# Altium PCB PCB1.PcbDoc (part 5 of 6)
Units mil, origin at the board's own origin, x right, y up, seen from the top; angles counter-clockwise.
Board outline 7480.32 x 4921.26 mil, 4 copper layers (Top Layer, GND, POWER, Bottom Layer), stack 23.756 mil thick; 513 components, 387 nets, 1792 pads, 594 vias.
Unrouted connection lines stored in the file: 21.
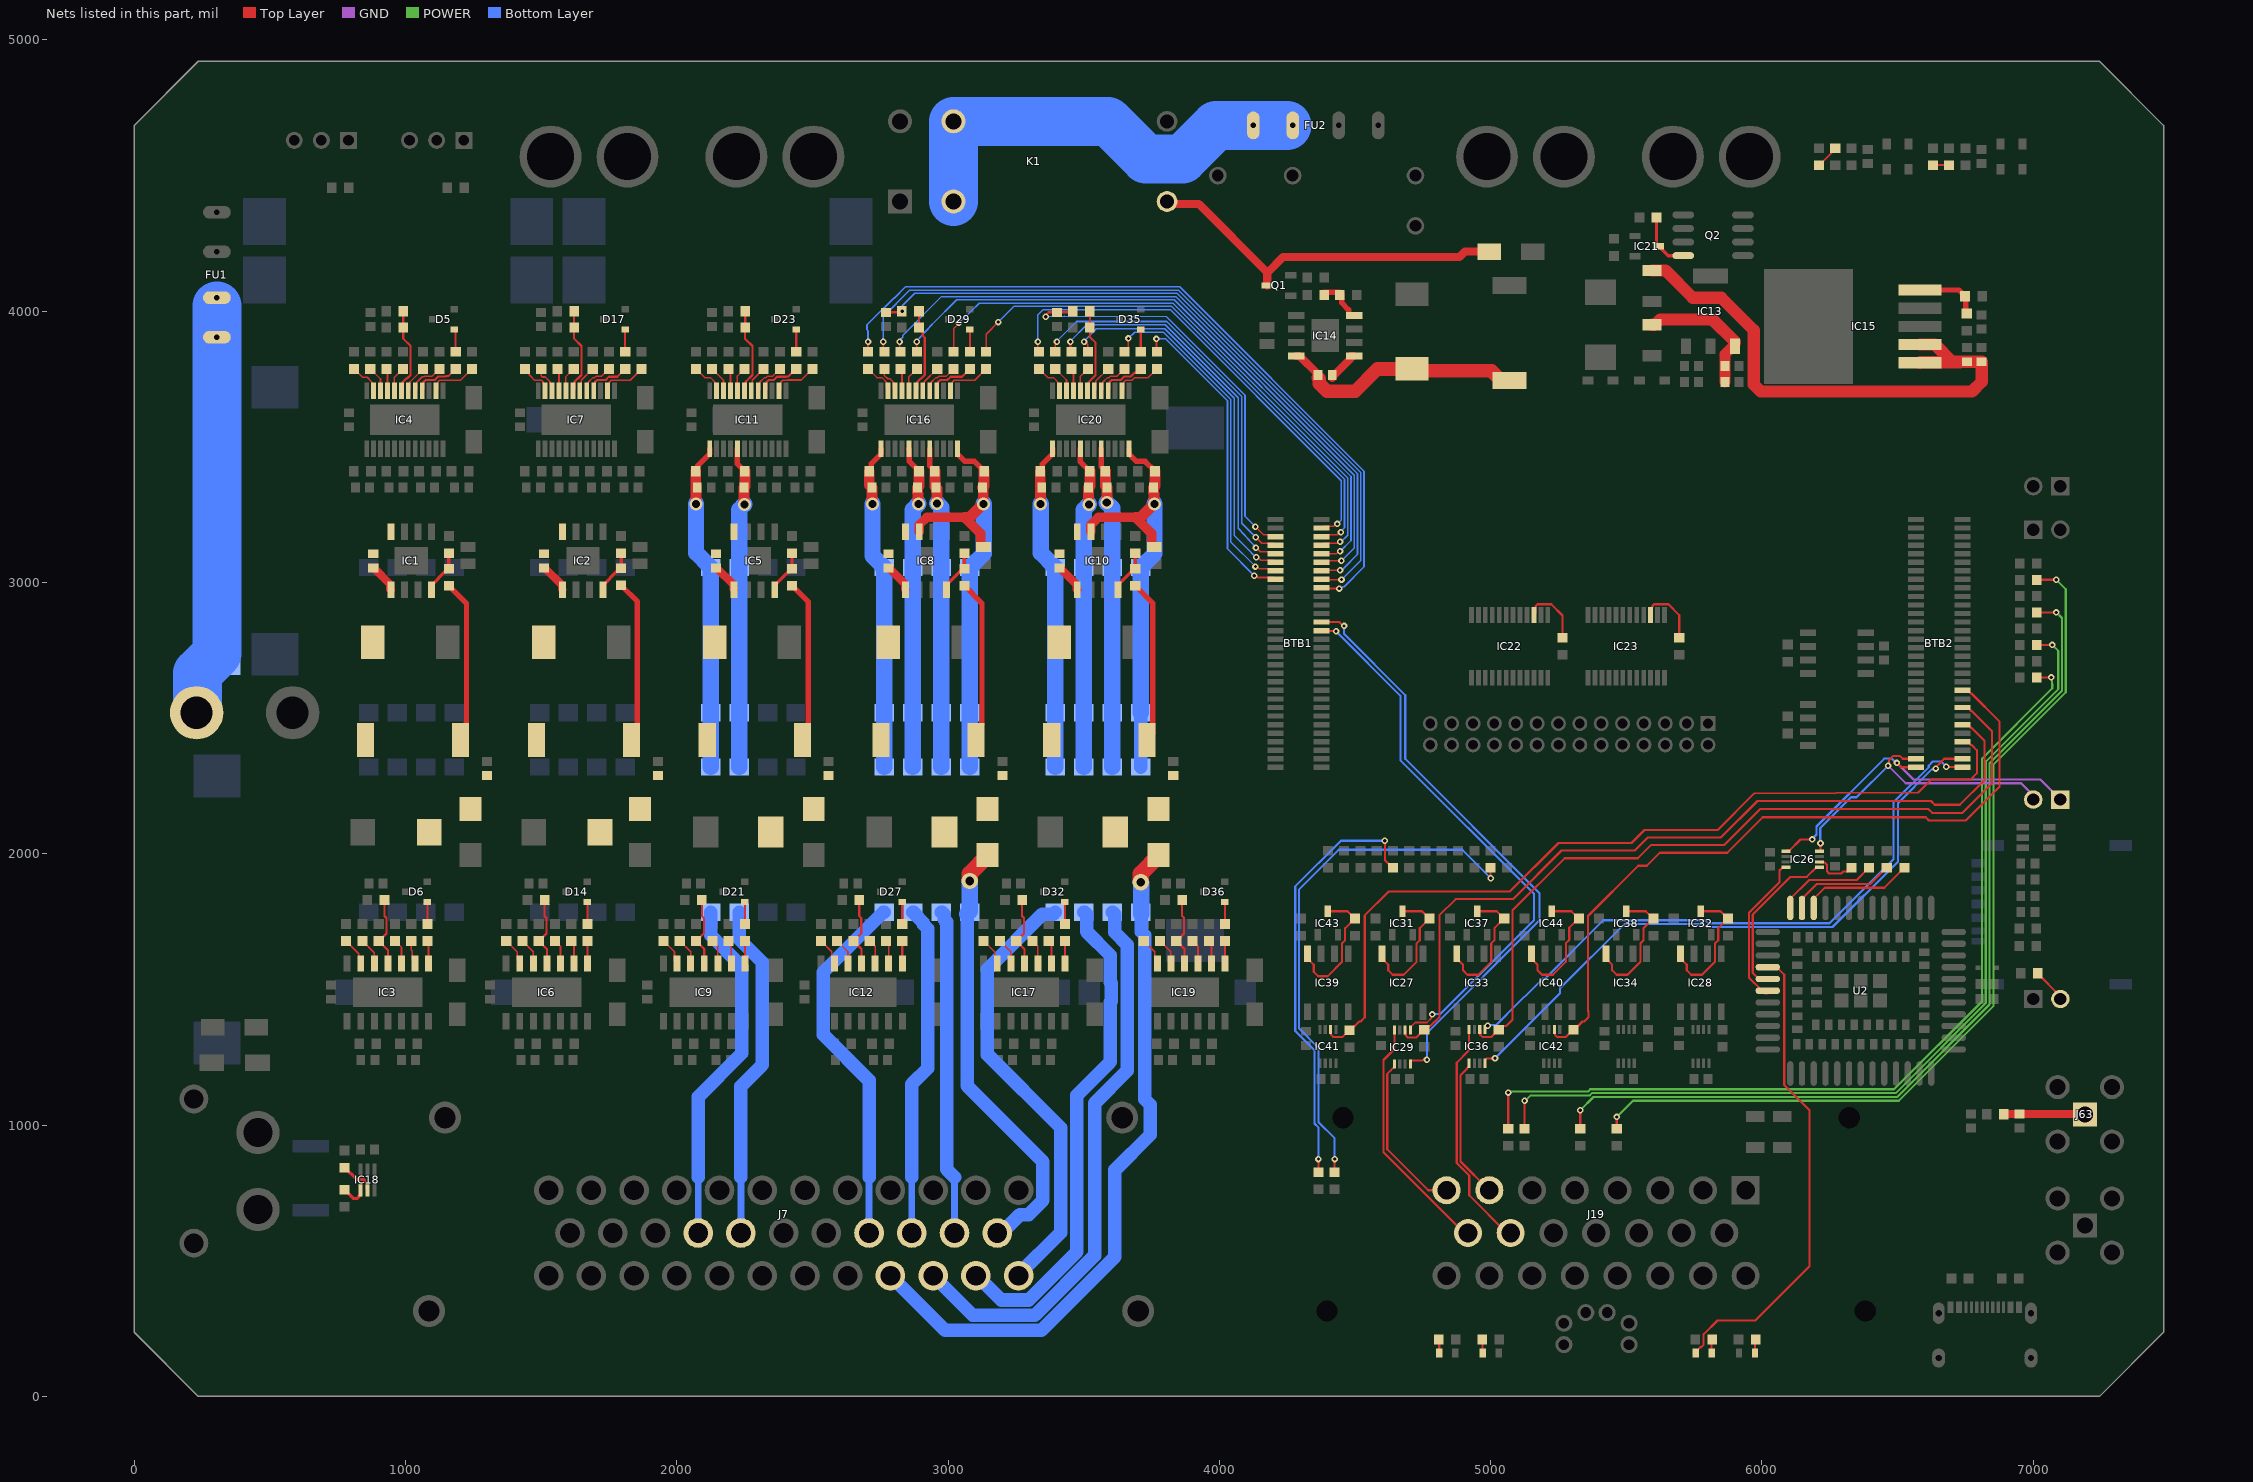
[diagram p6: the nets of this part, all layers, seen from the top]

## Via types
v1: diameter 24, hole 12, Top Layer to Bottom Layer, 532 vias
v2: diameter 48, hole 30, Top Layer to Bottom Layer, 20 vias
v3: diameter 48, hole 24, Top Layer to Bottom Layer, 16 vias
v4: diameter 48, hole 32, Top Layer to Bottom Layer, 10 vias
v5: diameter 60, hole 32, Top Layer to Bottom Layer, 7 vias
v6: diameter 251.97, hole 165.35, Top Layer to Bottom Layer, 4 vias
v7: diameter 31.5, hole 31.5, Top Layer to Bottom Layer, 2 vias
v8: diameter 47.24, hole 47.24, Top Layer to Bottom Layer, 2 vias
v9: diameter 36, hole 24, Top Layer to Bottom Layer, 1 vias

## Nets (pads, with @x,y where several pads share a name; then routed paths per layer and width w, separated by ;. In a path a pad name is that pad's centre, name@x,y a point inside that pad or via, vN(x,y) a via of type N, cw(c..) or ccw(c..) an arc to the next point about the centre after c; other vN are vias at no path point) (continued)
lpHSD3_OUT2: C50.2 IC11.17 J7.19 J42.1 J42.2 J45.1 J45.2 R77.2 | length 2432.7
  Top Layer w20: IC11.17@2223.6,3493.23 2223.6,3437.66 R77.2@2242.56,3418.7
  Top Layer w40: v2(2249.34,3288.08) 2247.81,3289.61 2247.81,3330.73 2247.24,3331.3 C50.2@2247.24,3350 2251.26,3354.02 R77.2@2251.26,3410
  Bottom Layer w25: J7.19@2236.38,602.52 2236.38,808.01
  Bottom Layer w50: J42.2@2230,1784.57 2230,1685 2315,1600 2315,1221.91 2236.38,1143.28 2236.38,808.01
  Bottom Layer w60: J42.1@2230,2320 J45.2@2230,2520 J45.1@2230,3055.43 2230,3268.74 v2(2249.34,3288.08)
lpHSD3_OUT3: C51.2 IC11.13 J7.20 J44.1 J44.2 J46.1 J46.2 R82.2 | length 2492.4
  Top Layer w20: 2077.48,3430.59 2121.24,3474.35 IC11.13@2121.24,3493.23
  Top Layer w40: R82.2@2069.76,3410 2069.76,3355.51 2071.26,3354.02 v2(2071.26,3290)
  Bottom Layer w25: J7.20@2078.9,602.52 2078.9,808.01
  Bottom Layer w50: 2078.9,808.01 2078.9,1103.9 2240,1265 2240,1585 2125,1700 J46.1@2125,1784.57
  Bottom Layer w60: v2(2071.26,3290) 2071.26,3109.17 2119.57,3060.87 2119.57,3056.93 2121.06,3055.43 J44.2@2125,3055.43 J44.1@2125,2520 J46.2@2125,2320
lpHSD4_DSEL0_PTD27: BTB1.26 R98.1 | length 2339.6
  Top Layer w6: v1(2885,3888) 2885,3850.28 R98.1@2885.28,3850 ; BTB1.26@4376.38,3106.3 4431.43,3106.3 4440.13,3115 v1(4445,3115)
  Bottom Layer w6: v1(2885,3888) 2885,3890.5 2941.61,3951.94 cw(c2960,3935) 2942.36,3952.71 3032,4042 3833.91,4042 4485.26,3390.65 4485.26,3154.9 4445.36,3115 v1(4445,3115)
lpHSD4_DSEL1_PTD29: BTB1.22 R109.1 | length 2817.9
  Top Layer w6: v1(2705,3888) 2705,3850.28 R109.1@2705.28,3850 ; BTB1.22@4376.38,2980.31 4380.23,2976.46 4381.66,2977.89 v1(4442.33,2977.89)
  Bottom Layer w6: v1(2705,3888) 2705,3928.07 2701.26,3931.81 2701.26,3950 2799.65,4048.39 2801.64,4048.39 2843.25,4090 3853.79,4090 4533.26,3410.53 4533.26,3057.9 4460.36,2985 4454.31,2985 4447.2,2977.89 v1(4442.33,2977.89)
lpHSD4_IN0_PTB9: BTB1.28 R90.1 | length 1972.3
  Top Layer w6: R90.1@3140.28,3850 3140.28,3915.28 v1(3185,3960) ; BTB1.28@4376.38,3169.29 4383.22,3176.13 4434.52,3176.13 4443.39,3185 v1(4448.26,3185)
  Bottom Layer w6: v1(3185,3960) 3243,4018 3823.97,4018 4461.26,3380.71 4461.26,3201.7 4448.26,3188.7 v1(4448.26,3185)
lpHSD4_IN1_PTD26: BTB1.27 R93.1 | length 2168.2
  Top Layer w6: R93.1@3020.28,3850 3021.26,3850.98 3021.26,3936.26 3040,3955 v1(3040,3957) ; BTB1.27@4376.38,3137.8 4383.22,3144.64 4434.77,3144.64 4440.13,3150 v1(4445,3150)
  Bottom Layer w6: v1(3040,3957) 3056.62,3972.97 ccw(c3039.3,3990.99) 3056.76,3973.11 3115,4030 3828.94,4030 4473.26,3385.68 4473.26,3174.64 4448.62,3150 v1(4445,3150)
lpHSD4_IN2_PTB8: BTB1.25 R101.1 | length 2474.7
  Top Layer w6: v1(2821.26,3888) 2821.26,3854.02 R101.1@2825.28,3850 ; BTB1.25@4376.38,3074.8 4381.57,3080 v1(4450,3080)
  Bottom Layer w6: v1(2821.26,3888) 2821.26,3892.87 2832.58,3904.19 2832.58,3910.62 2975.96,4054 3838.88,4054 4497.26,3395.62 4497.26,3127.26 v1(4450,3080)
lpHSD4_IN3_PTA1: BTB1.23 R104.1 | length 2709.4
  Top Layer w6: v1(2761.26,3888) 2761.26,3854.02 R104.1@2765.28,3850 ; BTB1.23@4376.38,3011.81 4377.23,3010.96 v1(4450.23,3010.96)
  Bottom Layer w6: v1(2761.26,3888) 2761.26,3980 2859.26,4078 3848.82,4078 4521.26,3405.56 4521.26,3081.26 4450.96,3010.96 v1(4450.23,3010.96)
lpHSD4_IS_PTD28: BTB1.24 C62.2 R96.1 | length 2509
  Top Layer w6: BTB1.24@4376.38,3043.31 4378.07,3045 v1(4445,3045)
  Top Layer w8: C62.2@2771.26,3995.98 2827.24,3995.98 v1(2831.26,4000)
  Bottom Layer w6: v1(2831.26,4000) 2831.26,4020 2877.26,4066 3843.85,4066 4509.26,3400.59 4509.26,3103.9 4460.36,3055 4459.87,3055 4449.87,3045 v1(4445,3045)
lpHSD4_OUT0: C36.2 C56.2 D19.1 IC8.7 IC16.24 J7.13 J30.1 J30.2 J35.1 J35.2 R91.2 | length 3335.6
  Top Layer w20: IC16.24@3034.87,3493.23 3034.87,3474.35 3062.24,3446.99 3096.76,3446.99 3132.76,3410.98 R91.2@3132.76,3410
  Top Layer w35: IC8.7@2893.76,3186.77 2893.76,3212.82 2921.23,3240.29 3060.86,3240.29 3120.14,3181.01 3120.14,3132.5 3121.54,3131.1 C36.2@3130,3131.1
  Top Layer w40: 3060.86,3240.29 3079.39,3240.29 3129.1,3290 v2(3131.26,3290) ; v2@3129.73,3291.53 3129.73,3347.51 C56.2@3127.24,3350 3132.76,3355.51 R91.2@3132.76,3410
  Top Layer w60: v5(3080,1900) 3080,1926.77 3145,1991.77 D19.1@3145,1995.71
  Bottom Layer w50: J30.1@3070,1778.07 3070,1145 3349.63,865.37 3349.63,722.88 3297.12,670.37 3265.15,670.37 3197.29,602.52 J7.13@3181.26,602.52
  Bottom Layer w60: J30.1@3070,1778.07 3080,1788.07 v5(3080,1900) ; J30.2@3080,2320 J35.2@3080,2520 J35.1@3080,3055.43 3083.94,3055.43 3085.43,3056.93 3085.43,3060.87 3131.26,3106.69 v2(3131.26,3290)
lpHSD4_OUT1: C61.2 IC16.20 J7.14 J49.1 J49.2 J51.1 J51.2 R97.2 | length 2395.4
  Top Layer w20: IC16.20@2932.51,3493.23 2932.51,3429.73 2951.26,3410.98 R97.2@2951.26,3410
  Top Layer w40: R97.2@2951.26,3410 2951.26,3354.02 C61.2@2955.28,3350 2959.73,3345.55 v2(2959.73,3291.79)
  Bottom Layer w25: J7.14@3023.78,602.52 3023.78,808.01
  Bottom Layer w50: J51.1@2975,1784.57 2978.94,1784.57 2985.43,1778.07 2985.43,1758.35 2995,1748.78 2995,836.79 3023.78,808.01
  Bottom Layer w60: v2(2959.73,3291.79) 2975,3276.52 J49.2@2975,3055.43 J49.1@2975,2520 J51.2@2975,2320
lpHSD4_OUT2: C63.2 IC16.17 J7.15 J50.1 J50.2 J53.1 J53.2 R105.2 | length 2432.8
  Top Layer w20: IC16.17@2855.74,3493.23 2856.47,3492.5 2856.47,3447.27 2892.76,3410.98 R105.2@2892.76,3410
  Top Layer w40: v2(2891.26,3290) 2889.73,3291.53 2889.73,3328.81 2887.24,3331.3 C63.2@2887.24,3350 2892.76,3355.51 R105.2@2892.76,3410
  Bottom Layer w25: J7.15@2866.3,602.52 2866.3,808.01
  Bottom Layer w50: 2866.3,808.01 2866.3,1151.38 2925,1210.08 2925,1723.8 2908.57,1740.23 2908.57,1746 2880.43,1774.13 2880.43,1778.07 2873.94,1784.57 J50.2@2870,1784.57
  Bottom Layer w60: J50.1@2870,2320 J53.2@2870,2520 J53.1@2870,3055.43 2870,3268.74 v2(2891.26,3290)
lpHSD4_OUT3: C73.2 IC16.13 J7.16 J52.1 J52.2 J54.1 J54.2 R115.2 | length 2564
  Top Layer w20: R115.2@2709.76,3410 2717.48,3417.72 2717.48,3438.45 2753.38,3474.35 IC16.13@2753.38,3493.23
  Top Layer w40: R115.2@2709.76,3410 2709.76,3359.53 2719.73,3349.56 2719.73,3291.53 v2(2721.26,3290)
  Bottom Layer w25: J7.16@2708.82,602.52 2708.82,808.01
  Bottom Layer w50: 2708.82,808.01 2708.82,1164.94 2540,1333.76 2540,1563.5 2761.06,1784.57 J52.2@2765,1784.57
  Bottom Layer w60: v2(2721.26,3290) 2721.26,3099.17 2759.57,3060.87 2759.57,3056.93 2761.06,3055.43 J54.1@2765,3055.43 J54.2@2765,2520 J52.1@2765,2320
lpHSD5_DSEL0_PTA3: BTB1.36 R134.1 | length 1422.8
  Top Layer w6: v1(3501.26,3888) 3503.26,3888 3515.28,3875.98 R134.1@3515.28,3850 ; v1(4136,3093) 4140.87,3093 4152.23,3081.65 4199.46,3081.65 BTB1.36@4206.3,3074.8
  Bottom Layer w6: v1(3501.26,3888) 3501.26,3889.72 3546.53,3934.99 3798.95,3934.99 4055,3678.94 4055,3173.31 4117.22,3110.42 ccw(c4135,3128) 4118.01,3109.66 v1(4136,3093)
lpHSD5_DSEL1_PTB10: BTB1.29 R145.1 | length 1755
  Top Layer w6: v1(3331.26,3888) 3331.26,3854.02 R145.1@3335.28,3850 ; BTB1.29@4376.38,3200.79 4383.22,3207.63 4421.16,3207.63 4429.62,3216.09 v1(4434.49,3216.09)
  Bottom Layer w6: v1(3331.26,3888) 3331.26,3986.62 3349.64,4005 3820,4005 4449.26,3375.74 4449.26,3230.44 4434.91,3216.09 v1(4434.49,3216.09)
lpHSD5_IN0_PTD24: BTB1.38 R121.1 | length 1173.8
  Top Layer w6: v1(3768.26,3897.99) 3768.26,3852.02 R121.1@3770.28,3850 ; v1(4129,3025) 4133.87,3025 4140.22,3018.65 4199.46,3018.65 BTB1.38@4206.3,3011.81
  Bottom Layer w6: v1(3768.26,3897.99) 3802.01,3897.99 4030,3670 4030,3124 v1(4129,3025)
lpHSD5_IN1_PTA2: BTB1.37 R126.1 | length 1279.1
  Top Layer w6: R126.1@3650.28,3850 3664.68,3864.4 v1(3664.68,3899.93) ; v1(4133,3058.76) 4137.87,3058.76 4146.48,3050.15 4199.46,3050.15 BTB1.37@4206.3,3043.31
  Bottom Layer w6: v1(3664.68,3899.93) 3687.74,3922.99 3793.98,3922.99 4042,3674.97 4042,3149.76 v1(4133,3058.76)
lpHSD5_IN2_PTD23: BTB1.35 R139.1 | length 1455
  Top Layer w6: v1(3451.26,3888) 3451.26,3854.02 R139.1@3455.28,3850 ; v1(4135,3128) 4136.36,3128 4151.21,3113.14 4199.46,3113.14 BTB1.35@4206.3,3106.3
  Bottom Layer w6: v1(3451.26,3888) 3451.26,3890 3511.26,3950 3800.91,3950 4070,3680.91 4070,3202.09 4070,3199.78 4071.55,3198.07 v1(4135,3128)
lpHSD5_IN3_PTD2: BTB1.34 R142.1 | length 1492.2
  Top Layer w6: R142.1@3395.28,3850 3395.28,3879.14 3401.26,3885.13 v1(3401.26,3888) ; v1(4134,3167) 4156.36,3144.64 4199.46,3144.64 BTB1.34@4206.3,3137.8
  Bottom Layer w6: v1(3401.26,3888) 3401.26,3890 3473.26,3962 3787.14,3962 3805.88,3962 4082,3685.88 4082,3219 v1(4134,3167)
lpHSD5_IS_PTD3: BTB1.33 C81.2 R131.1 | length 1554.4
  Top Layer w6: v1(4133,3206) 4162.87,3176.13 4179.77,3176.13 4186.61,3169.29 BTB1.33@4206.3,3169.29
  Top Layer w8: v1(3360,3980) 3363.06,3983.06 3363.06,3988.29 3370.76,3995.98 3455.75,3995.98 R131.1@3459.76,4000
  Bottom Layer w6: v1(3360,3980) 3429.28,3981.99 cw(c3430,3957) 3430.18,3982 3804.85,3980 4094.5,3690.35 4094.5,3244.5 v1(4133,3206)
lpHSD5_OUT0: C46.2 C78.2 D24.1 IC10.7 IC20.24 J7.27 J38.1 J38.2 J40.1 J40.2 R123.2 | length 4292.5
  Top Layer w20: IC20.24@3667.01,3493.23 3667.01,3474.35 3694.37,3446.99 3726.76,3446.99 3762.76,3410.98 R123.2@3762.76,3410
  Top Layer w35: IC10.7@3526.26,3186.77 3526.26,3212.82 3553.73,3240.29 3690.86,3240.29 3750.14,3181.01 3750.14,3132.5 3751.54,3131.1 C46.2@3760,3131.1
  Top Layer w40: 3690.86,3240.29 3709.39,3240.29 3759.1,3290 v2(3761.26,3290) ; v2@3759.73,3291.53 3759.73,3328.81 3757.24,3331.3 C78.2@3757.24,3350 3762.76,3355.51 R123.2@3762.76,3410
  Top Layer w60: v5(3710,1895) 3710,1926.77 3775,1991.77 D24.1@3775,1995.71
  Bottom Layer w50: J7.27@2787.56,445.04 2989.19,243.41 3343.52,243.41 3615,514.9 3615,835 3745,965 3745,1075 3725,1095 3725,1700 3711.71,1713.29 J40.1@3711.71,1778.07 ; J40.2@3710,2320 J38.1@3710,2520
  Bottom Layer w60: v5(3710,1895) 3711.71,1893.29 J40.1@3711.71,1778.07 ; J38.1@3710,2520 J38.2@3710,3055.43 3713.94,3055.43 3715.43,3056.93 3715.43,3060.87 3761.26,3106.69 v2(3761.26,3290)
lpHSD5_OUT1: C80.2 IC20.20 J7.26 J57.1 J57.2 J59.1 J59.2 R132.2 | length 3253.5
  Top Layer w20: R132.2@3564.65,3426.1 IC20.20@3564.65,3493.23
  Top Layer w40: R132.2@3579.76,3410 3579.76,3355.51 C80.2@3585.28,3350 3585.28,3294.62 v2(3585.1,3294.45)
  Bottom Layer w50: J7.26@2945.04,445.04 3090.67,299.41 3320.32,299.41 3540,519.09 3540,1080 3660,1200 3660,1665 3614.21,1710.79 3614.21,1778.07 3607.72,1784.57 J57.2@3605,1784.57
  Bottom Layer w60: v2(3585.1,3294.45) 3605,3274.56 J59.1@3605,3055.43 J59.2@3605,2520 J57.1@3605,2320
lpHSD5_OUT2: C83.2 IC20.17 J7.25 J58.1 J58.2 J61.1 J61.2 R143.2 | length 3017.5
  Top Layer w20: IC20.17@3487.87,3493.23 3487.87,3444.88 R143.2@3514.06,3418.7
  Top Layer w40: v2(3519.41,3288.15) 3517.88,3289.68 3517.88,3330.67 3517.24,3331.3 C83.2@3517.24,3350 3522.76,3355.51 R143.2@3522.76,3410
  Bottom Layer w50: J7.25@3102.52,445.04 3106.59,445.04 3196.21,355.41 3297.12,355.41 3475,533.29 3475,1110 3598,1233 3598,1453.45 3601,1456.45 3601,1523.55 3598,1526.55 3598,1626.2 3510.43,1713.76 3510.43,1778.07 3503.94,1784.57 J61.1@3500,1784.57
  Bottom Layer w60: J61.2@3500,2320 J58.1@3500,2520 J58.2@3500,3055.43 3500,3268.74 v2(3519.41,3288.15)
lpHSD5_OUT3: C85.2 IC20.13 J7.24 J60.1 J60.2 J62.1 J62.2 R149.2 | length 2860.2
  Top Layer w20: R149.2@3339.76,3410 3347.48,3417.72 3347.48,3436.32 3385.51,3474.35 IC20.13@3385.51,3493.23
  Top Layer w40: R149.2@3339.76,3410 3339.76,3355.51 3341.26,3354.02 v2(3341.26,3290)
  Bottom Layer w50: J7.24@3260,445.04 3260,449.11 3415,604.11 3415,990 3145,1260 3145,1575 3348.07,1778.07 3388.5,1778.07 J62.1@3395,1784.57
  Bottom Layer w60: v2(3341.26,3290) 3341.26,3109.17 3389.57,3060.87 3389.57,3056.93 3391.06,3055.43 J60.2@3395,3055.43 J60.1@3395,2520 J62.2@3395,2320
LPUART0_RX_PTC3: BTB2.60 IC26.1 J64.1 | length 1312.4
  Top Layer w8: IC26.1@6087.99,2009.53 6089.9,2011.43 6100.72,2011.43 6142.29,2053 v1(6185,2053) ; v1(6497.5,2335) 6497.84,2335 6513.39,2319.45 6567.95,2319.45 BTB2.60@6568.5,2318.9
  GND w8: v1(6497.5,2335) 6558.4,2274.09 7025.91,2274.09 J64.1@7100,2200
  Bottom Layer w8: v1(6185,2053) 6185,2054.94 6201,2070.94 6201,2101 6451,2351 6479.56,2351 6495.56,2335 v1(6497.5,2335)
LPUART0_TX_PTC2: BTB2.59 IC26.8 J64.2 | length 1162
  Top Layer w8: IC26.8@6212.01,2009.53 6213.9,2009.53 6215.81,2011.43 v1(6215.81,2038.62) ; v1(6465,2325) 6468.06,2328.06 6468.06,2344.83 6484.23,2361 6508.3,2361 6518.91,2350.39 BTB2.59@6568.5,2350.39
  GND w8: v1(6465,2325) 6529.91,2260.09 6955,2260.09 7000,2215.09 J64.2@7000,2200
  Bottom Layer w8: v1(6215.81,2038.62) 6215,2039.43 6215,2095 6328.47,2208.47 6348.47,2208.47 v1(6465,2325)
LPUART1_RX_PTC6: BTB1.17 IC29.5 | length 2057.9
  Top Layer w6: IC29.5@4704.37,1350 4704.37,1360.83 4721.76,1378.21 4765.53,1378.21 4781.56,1394.24 4781.56,1404.56 v1(4785,1408)
  Top Layer w8: BTB1.17@4376.38,2822.83 4377.8,2821.42 4428.58,2821.42 v1(4430,2820)
  Bottom Layer w8: v1(4430,2820) 4667.34,2582.66 4667.34,2345.32 5160,1852.66 5160,1755 4815,1410 4787,1410 v1(4785,1408)
LPUART1_RX_PTC6_H: IC29.8 J19.15 | length 901.4
  Top Layer w8: IC29.8@4645.31,1350 4645.31,1280.31 4605,1240 4605,899.76 4902.24,602.52 J19.15@4916.38,602.52
LPUART1_TX_PTC7: BTB1.18 IC29.4 | length 2236
  Top Layer w8: BTB1.18@4376.38,2854.33 4441.34,2854.33 4455.49,2840.18 v1(4459.82,2840.18) ; IC29.4@4704.37,1225.98 4704.37,1236.81 4706.28,1238.72 4749.39,1238.72 4755.67,1245 4756.56,1245 4760.99,1240.57 v1(4765.32,1240.57)
  Bottom Layer w8: v1(4459.82,2840.18) 4459.82,2810.18 4685,2585 4685,2350 5180,1855 5180,1755 4765.83,1340.83 4765.83,1241.09 v1(4765.32,1240.57)
LPUART1_TX_PTC7_H: IC29.1 J19.8 | length 607.1
  Top Layer w8: IC29.1@4645.31,1225.98 4645.31,1215.16 4632.1,1201.94 4631.97,1201.94 4619,1188.97 4619,911 4770,760 J19.8@4837.64,760
LPUART14_RX_PTB21: BTB2.2 IC36.4 | length 2378.8
  Top Layer w8: IC36.4@4979.53,1227.99 4979.53,1238.82 4985.71,1245 5014.34,1245 v1(5016,1246.66) ; v1(6640.71,2314.32) 6640.71,2318.65 6657.81,2335.76 6657.81,2336.81 6671.39,2350.39 BTB2.2@6738.58,2350.39
  Bottom Layer w8: v1(5016,1246.66) 5255.92,1486.57 5255.92,1504.15 5492.77,1741 5785.77,1741 5796.77,1730 6260,1730 6501.32,1971.32 6501.32,2186.32 6626.26,2311.26 6637.65,2311.26 v1(6640.71,2314.32)
LPUART14_RX_PTB21_H: IC36.1 J19.7 | length 525
  Top Layer w8: IC36.1@4920.47,1227.99 4920.47,1217.17 4912.5,1209.2 4912.5,1207.47 4889,1183.97 4889,866.12 J19.7@4995.12,760
LPUART14_TX_PTB20: BTB2.1 IC36.5 | length 2319
  Top Layer w6: IC36.5@4979.53,1352.01 4979.53,1362.83 4982.95,1366.26 v1(4989.3,1366.26)
  Top Layer w8: v1(6679.45,2321.22) 6680.61,2320.06 6737.42,2320.06 BTB2.1@6738.58,2318.9
  Bottom Layer w8: v1(4989.3,1366.26) 4991.84,1368.8 5020.6,1368.8 5059.8,1408 5059.8,1408.12 5191.67,1540 5200,1540 5415,1755 5791.57,1755 5802.57,1744 6249,1744 6485,1980 6485,2190 6614.71,2319.71 6614.71,2325.09 6629.94,2340.32 6660.34,2340.32 v1(6679.45,2321.22)
LPUART14_TX_PTB20_H: IC36.8 J19.14 | length 859
  Top Layer w8: IC36.8@4920.47,1352.01 4920.47,1275.47 4875,1230 4875,860.32 4921,814.32 4921,741.24 5059.72,602.52 J19.14@5073.86,602.52
MAIN_RXD: IC26.5 U2.17 | length 597.9
  Top Layer w8: U2.17@6021.61,1538.74 5988.15,1538.74 5966.33,1560.55 5966.33,1776.33 6105,1915 6165.71,1915 6201.18,1950.47 IC26.5@6212.01,1950.47
MAIN_TXD: IC26.4 U2.18 | length 563.8
  Top Layer w8: U2.18@6022.48,1485 6011.04,1485 6000.61,1495.43 5952.33,1543.71 5952.33,1782.33 6065,1895 6065,1938.31 6077.17,1950.47 IC26.4@6087.99,1950.47
NET_STATUS: LED3.1 U2.16 | length 1762
  Top Layer w8: LED3.1@5755.47,160 5755.47,163.93 5772.83,181.3 5775.36,181.3 5785,190.94 5785,229.06 5835.94,280 5975.2,280 6175,479.8 6175,1055.29 6082.48,1147.81 6082.48,1554.64 6055.07,1582.04 U2.16@6021.61,1582.04
NetC2_1: C2.1 IC1.1 | length 109
  Top Layer w30: C2.1@881.26,3054.02 883.43,3054.02 944.06,2993.39 944.06,2975.43 IC1.1@946.26,2973.23
NetC2_2: C2.2 D3.1 IC1.8 L1.1
NetC3_1: C3.1 C6.2 D2.2 L1.2 R1.1 | length 605.2
  Top Layer w20: R1.1@1160,2988.5 1160.98,2988.5 1168.7,2980.79 1168.7,2979.8 1225,2923.5 1225,2484.71 1224.24,2483.94 1224.24,2441.5 L1.2@1202.74,2420
NetC14_1: C14.1 IC2.1 | length 110
  Top Layer w30: C14.1@1511.26,3054.02 1513.43,3054.02 1576.56,2990.89 1576.56,2975.43 IC2.1@1578.76,2973.23
NetC14_2: C14.2 D10.1 IC2.8 L3.1
NetC15_1: C15.1 C18.2 D9.2 L3.2 R26.1 | length 604.1
  Top Layer w20: R26.1@1795,2990 1855,2930 1855,2484.71 1854.24,2483.94 1854.24,2441.5 L3.2@1832.74,2420
NetC22_1: C22.1 IC5.1 | length 109.5
  Top Layer w30: C22.1@2145,3054.02 2147.17,3054.02 2209.06,2992.13 2209.06,2975.43 IC5.1@2211.26,2973.23
NetC22_2: C22.2 D16.1 IC5.8 L4.1
NetC24_1: C24.1 C26.2 D15.2 L4.2 R38.1 | length 602.6
  Top Layer w20: R38.1@2425,2988.5 2485,2928.5 2485,2484.71 2484.24,2483.94 2484.24,2441.5 L4.2@2462.74,2420
NetC34_1: C34.1 IC8.1 | length 108.5
  Top Layer w30: C34.1@2780,3054.02 2782.17,3054.02 2841.56,2994.63 2841.56,2975.43 IC8.1@2843.76,2973.23
NetC34_2: C34.2 D20.1 IC8.8 L5.1
NetC35_1: C35.1 C37.2 D19.2 L5.2 R54.1 | length 604.6
  Top Layer w20: R54.1@3060,2988.5 3125,2923.5 3125,2484.71 3124.24,2483.94 3124.24,2472.99 3102.74,2451.5 L5.2@3102.74,2420
NetC43_1: C43.1 IC10.1 | length 109.5
  Top Layer w30: C43.1@3410,3054.02 3412.17,3054.02 3474.05,2992.13 3474.05,2975.43 IC10.1@3476.26,2973.23
NetC43_2: C43.2 D25.1 IC10.8 L6.1
NetC44_1: C44.1 C47.2 D24.2 L6.2 R72.1 | length 604.6
  Top Layer w20: R72.1@3690,2988.5 3755,2923.5 3755,2484.71 3754.24,2483.94 3754.24,2441.5 L6.2@3732.74,2420
NetC57_1: C57.1 IC14.1 | length 121
  Top Layer w30: C57.1@4415.98,3755 4415.98,3757.17 4481.75,3822.93 4481.75,3832.8 4483.96,3835 IC14.1@4496.77,3835
NetC57_2: C57.2 D31.1 IC14.8 L7.1 | length 908.7
  Top Layer w30: IC14.8@4283.23,3835 4296.04,3835 4362.68,3768.37 4362.68,3756.34 C57.2@4364.02,3755
  Top Layer w50: C57.2@4364.02,3755 4368.65,3750.37 4368.65,3733.66 4396.81,3705.5 4500.5,3705.5 4582.2,3787.2 D31.1@4710,3787.2 4717.2,3780 5003.31,3780 5038.5,3744.8 L7.1@5070,3744.8
NetC65_2: C65.2 C66.2 F3.1 IC15.1 IC15.2 | length 2009.4
  Top Layer w45: F3.1@5595,4150 5645,4150 5745,4050 5850,4050 5970,3930 5970,3730.14 5995.95,3704.19 6774.19,3704.19 6810,3740 C66.2@6810,3814.02 C65.2@6755,3814.02 6731.6,3814.02 ; IC15.1@6582.76,3810.17 6584.76,3812.18 6729.76,3812.18 6731.6,3814.02 ; IC15.2@6582.76,3877.18 6637.76,3877.18 6700.92,3814.02 6731.6,3814.02
NetC70_2: C70.2 C71.2 F4.1 IC13.3 | length 511.2
  Top Layer w40: C70.2@5864.02,3738.74 C71.2@5864.02,3798.74 5864.02,3841.69 5900.16,3877.83 IC13.3@5900.16,3885.08
  Top Layer w45: F4.1@5595,3950 5605.12,3950 5625.12,3970 5817.48,3970 5900.16,3887.32 IC13.3@5900.16,3885.08
NetC91_2: C91.2 J63.1 R167.2 | length 299.3
  Top Layer w30: R167.2@6891.5,1040 6891.99,1040.49 6949.51,1040.49 C91.2@6950,1040.98 6950.49,1040.49 7189.51,1040.49 J63.1@7190,1040
NetD5_1: D5.1 R4.1 | length 77.1
  Top Layer w8: D5.1@1184.67,3926.88 1184.67,3850.61 R4.1@1185.28,3850
NetD6_1: D6.1 R5.1 | length 81.4
  Top Layer w8: D6.1@1080.63,1822.6 1081.26,1821.97 R5.1@1081.26,1741.5
NetD11_2: D11.2 K1.5 Q1.3 | length 1370.9
  Top Layer w30: K1.5@3807.4,4404.72 3816.35,4395.78 3924.22,4395.78 4176.69,4143.31 Q1.3@4176.69,4095 ; 4176.69,4141.69 4235,4200 4885.21,4200 4905.21,4220 D11.2@4989.29,4220
NetD14_1: D14.1 R29.1 | length 81.4
  Top Layer w8: D14.1@1670.63,1822.6 1671.26,1821.97 R29.1@1671.26,1741.5
NetD17_1: D17.1 R37.1 | length 82.9
  Top Layer w8: D17.1@1809.65,3932.6 1809.65,3850.63 R37.1@1810.28,3850
NetD21_1: D21.1 R55.1 | length 81.4
  Top Layer w8: D21.1@2250.63,1822.6 2251.26,1821.97 R55.1@2251.26,1741.5
NetD23_1: D23.1 R67.1 | length 83.5
  Top Layer w8: D23.1@2439.65,3932.6 D23.1@2440.28,3931.97 ; R67.1@2440.28,3850 D23.1@2440.28,3931.97 ; D23.1@2440.28,3932.6 D23.1@2440.28,3931.97
NetD27_1: D27.1 R80.1 | length 81.4
  Top Layer w8: D27.1@2830.63,1822.6 2831.26,1821.97 R80.1@2831.26,1741.5
NetD29_1: D29.1 R92.1 | length 82.7
  Top Layer w8: R92.1@3080.28,3850 3080.63,3850.35 D29.1@3080.63,3932.6
NetD32_1: D32.1 R99.1 | length 81.4
  Top Layer w8: D32.1@3430.63,1822.6 3431.26,1821.97 R99.1@3431.26,1741.5
NetD35_1: D35.1 R124.1 | length 82.7
  Top Layer w8: R124.1@3710.28,3850 3710.28,3932.24 D35.1@3710.63,3932.6
NetD36_1: D36.1 R125.1 | length 81.4
  Top Layer w8: D36.1@4020.63,1822.6 4021.26,1821.97 R125.1@4021.26,1741.5
NetFU1_2: FU1.2 J8.1 J8.2 L2.1 | length 1513.2
  Bottom Layer w180: L2.1@230,2520 233.22,2523.22 233.22,2666.1 J8.2@305,2737.87 J8.1@305,3722.13 ; J8.1@305,3740 FU1.2@305,3904.33 305,4020
NetFU2_2: FU2.2 K1.3 K1.4 | length 1633.7
  Bottom Layer w180: K1.3@3020,4404.72 K1.4@3020,4700 3590,4700 3728.39,4561.61 3864.72,4561.61 3988.11,4685 FU2.2@4250,4685
NetIC1_4: IC1.4 R1.2 R7.2 | length 163.3
  Top Layer w12: IC1.4@1096.26,2973.23 1096.26,2990.45 1145.59,3039.78 1148.28,3039.78 R1.2@1160,3051.5 R7.2@1160,3108.5
NetIC2_4: IC2.4 R26.2 R27.2 | length 164.9
  Top Layer w12: IC2.4@1728.76,2973.23 1728.76,2990.45 1779.58,3041.28 1783.28,3041.28 R26.2@1795,3052.99 R27.2@1795,3108.5
NetIC3_1: IC3.1 R5.2 | length 84
  Top Layer w8: R5.2@1081.26,1678.5 1085.15,1674.61 IC3.1@1085.15,1596.14
NetIC3_2: IC3.2 R8.2 | length 88
  Top Layer w6: R8.2@1021.43,1678.5 1021.43,1645.44 1025.35,1641.51 1025.35,1605.94 IC3.2@1035.15,1596.14
NetIC3_3: IC3.3 R10.2 | length 92.8
  Top Layer w6: R10.2@961.26,1678.5 962.24,1678.5 985.15,1655.6 IC3.3@985.15,1596.14
NetIC3_4: IC3.4 R14.2 R19.1 | length 262.9
  Top Layer w8: R19.1@901.26,1678.5 R19.1@902.24,1678.5 ; R14.2@922.76,1830 922.76,1770.56 929.96,1763.35 929.96,1706.22 R19.1@902.24,1678.5 ; IC3.4@935.15,1596.14 935.15,1645.6 R19.1@902.24,1678.5
NetIC3_5: IC3.5 R16.2 | length 101.1
  Top Layer w6: R16.2@842.24,1678.5 885.15,1635.6 IC3.5@885.15,1596.14
  Top Layer w8: R16.2@841.26,1678.5 R16.2@842.24,1678.5
NetIC3_6: IC3.6 R20.2 | length 105.3
  Top Layer w6: R20.2@781.26,1678.5 782.24,1678.5 796.96,1663.79 796.96,1662.8 828.12,1631.65 828.12,1603.17 IC3.6@835.15,1596.14
NetIC4_2: IC4.2 R2.2 | length 180.9
  Top Layer w6: IC4.2@1112.87,3706.77 1118.73,3712.63 1118.73,3738.65 1126.38,3746.29 1203.57,3746.29 R2.2@1244.29,3787.01
  Top Layer w8: R2.2@1244.29,3787.01 R2.2@1245.28,3787.01
NetIC4_4: IC4.4 R4.2 | length 172.9
  Top Layer w8: IC4.4@1061.69,3706.77 1066.55,3711.63 1066.55,3739.06 1074.28,3746.79 1108.05,3746.79 1120.55,3759.29 1148.12,3759.29 1149.62,3760.79 1158.08,3760.79 1184.29,3787.01 R4.2@1185.28,3787.01
NetIC4_5: IC4.5 R6.2 | length 137.6
  Top Layer w6: IC4.5@1036.1,3706.77 1041.96,3712.63 1041.96,3738.65 1061.61,3758.29 1067.4,3758.29 1068.9,3759.79 1097.08,3759.79 R6.2@1124.29,3787.01
  Top Layer w8: R6.2@1124.29,3787.01 R6.2@1125.28,3787.01
NetIC4_6: IC4.6 R9.2 | length 103.5
  Top Layer w6: IC4.6@1010.51,3706.77 1016.37,3712.63 1016.37,3739.09 1064.29,3787.01 R9.2@1065.28,3787.01
NetIC4_7: IC4.7 R12.2 R17.1 | length 320.4
  Top Layer w8: IC4.7@984.92,3706.77 989.78,3711.63 989.78,3739.06 1002.82,3752.1 1005.93,3752.1 1018.98,3765.15 1018.98,3871.86 991.77,3899.06 R17.1@991.77,3940 R12.2@991.77,4000
NetIC4_8: IC4.8 R15.2 | length 93.6
  Top Layer w6: IC4.8@959.33,3706.77 959.33,3757.05 989.29,3787.01 R15.2@990.28,3787.01
NetIC4_9: IC4.9 R18.2 | length 94.2
  Top Layer w6: R18.2@930.28,3787.01 933.74,3783.54 IC4.9@933.74,3706.77
  Top Layer w8: R18.2@933.74,3787.01 R18.2@933.74,3799.49
NetIC4_10: IC4.10 R21.2 | length 96.5
  Top Layer w6: R21.2@870.28,3787.01 871.26,3787.01 908.15,3750.12 IC4.10@908.15,3706.77
NetIC4_11: IC4.11 R24.2 | length 120.8
  Top Layer w6: R24.2@810.28,3787.01 811.26,3787.01 841.86,3756.41 858.94,3756.41 876.7,3738.65 876.7,3712.63 IC4.11@882.56,3706.77
NetIC5_4: IC5.4 R38.2 R47.2 | length 163.3
  Top Layer w12: IC5.4@2361.26,2973.23 2361.26,2990.45 2410.59,3039.78 2413.28,3039.78 R38.2@2425,3051.5 R47.2@2425,3108.5
NetIC6_1: IC6.1 R29.2 | length 82.4
  Top Layer w8: IC6.1@1671.26,1596.14 R29.2@1671.26,1678.5
NetIC6_2: IC6.2 R30.2 | length 86.5
  Top Layer w6: R30.2@1611.26,1678.5 1621.26,1668.5 IC6.2@1621.26,1596.14
NetIC6_3: IC6.3 R31.2 | length 91.2
  Top Layer w6: R31.2@1551.26,1678.5 1552.24,1678.5 1571.26,1659.49 IC6.3@1571.26,1596.14
NetIC6_4: IC6.4 R34.2 R39.1 | length 261.3
  Top Layer w8: R39.1@1491.26,1678.5 R39.1@1492.24,1678.5 ; R34.2@1512.76,1830 1512.76,1770.56 1519.96,1763.35 1519.96,1706.22 R39.1@1492.24,1678.5 ; IC6.4@1521.26,1596.14 1521.26,1649.49 R39.1@1492.24,1678.5
NetIC6_5: IC6.5 R36.2 | length 99.5
  Top Layer w6: R36.2@1431.26,1678.5 1432.24,1678.5 1471.26,1639.49 IC6.5@1471.26,1596.14
NetIC6_6: IC6.6 R40.2 | length 103.6
  Top Layer w6: R40.2@1371.26,1678.5 1372.24,1678.5 1411.46,1639.28 1411.46,1605.94 IC6.6@1421.26,1596.14
NetIC7_2: IC7.2 R33.2 | length 174.3
  Top Layer w6: IC7.2@1745.01,3706.77 1750.87,3712.63 1750.87,3738.65 1758.01,3745.79 1829.06,3745.79 1854.57,3771.31 1854.57,3772.29 1869.29,3787.01 R33.2@1870.28,3787.01
NetIC7_4: IC7.4 R37.2 | length 165.7
  Top Layer w8: IC7.4@1693.83,3706.77 1698.69,3711.63 1698.69,3739.06 1706.42,3746.79 1737.8,3746.79 1749.8,3758.79 1781.08,3758.79 1809.29,3787.01 R37.2@1810.28,3787.01
NetIC7_5: IC7.5 R41.2 | length 130.5
  Top Layer w6: IC7.5@1668.24,3706.77 1674.1,3712.63 1674.1,3738.65 1690.92,3755.47 1696.71,3755.47 1701.03,3759.79 1722.08,3759.79 1749.29,3787.01 R41.2@1750.28,3787.01
NetIC7_6: IC7.6 R43.2 | length 100.5
  Top Layer w6: IC7.6@1642.65,3706.77 1648.08,3712.2 1648.08,3745.79 1689.29,3787.01 R43.2@1690.28,3787.01
NetIC7_7: IC7.7 R44.2 R48.1 | length 318.3
  Top Layer w8: IC7.7@1617.06,3706.77 1621.92,3711.63 1621.92,3739.06 1634.96,3752.1 1635.93,3752.1 1648.98,3765.15 1648.98,3871.86 1621.77,3899.06 R48.1@1621.77,3940 R44.2@1621.77,4000
NetIC7_8: IC7.8 R46.2 | length 92.7
  Top Layer w6: IC7.8@1591.47,3706.77 1591.47,3759.18 1619.29,3787.01 R46.2@1620.28,3787.01
NetIC7_9: IC7.9 R49.2 | length 102.9
  Top Layer w6: R49.2@1545.88,3772.61 R49.2@1560.28,3787.01 1565.88,3781.41 IC7.9@1565.88,3706.77
NetIC7_10: IC7.10 R50.2 | length 103.5
  Top Layer w6: R50.2@1500.28,3787.01 1500.28,3761.31 1503.79,3757.79 1515.28,3757.79 1532.55,3740.52 1532.55,3735.67 1540.29,3727.93 IC7.10@1540.29,3706.77
NetIC7_11: IC7.11 R52.2 | length 133.8
  Top Layer w6: R52.2@1434.34,3787.13 1441.1,3787.13 1455.94,3772.29 1455.94,3765.53 1475.68,3745.79 1501.69,3745.79 1506.96,3740.52 1506.96,3735.67 1514.69,3727.93 IC7.11@1514.69,3706.77 ; R52.2@1440.28,3787.01 R52.2@1441.26,3787.01
NetIC8_4: IC8.4 R54.2 R60.2 | length 165.8
  Top Layer w12: IC8.4@2993.76,2973.23 2993.76,2990.45 3043.09,3039.78 3048.28,3039.78 R54.2@3060,3051.5 R60.2@3060,3108.5
NetIC9_1: IC9.1 R55.2 | length 82.4
  Top Layer w8: IC9.1@2251.26,1596.14 R55.2@2251.26,1678.5
NetIC9_2: IC9.2 R56.2 | length 86.5
  Top Layer w6: R56.2@2191.26,1678.5 2201.26,1668.5 IC9.2@2201.26,1596.14
NetIC9_3: IC9.3 R57.2 | length 91.2
  Top Layer w6: R57.2@2131.26,1678.5 2132.24,1678.5 2151.26,1659.49 IC9.3@2151.26,1596.14
NetIC9_4: IC9.4 R59.2 R62.1 | length 261.3
  Top Layer w8: R62.1@2071.26,1678.5 R62.1@2072.24,1678.5 ; R59.2@2092.76,1830 2092.76,1770.56 2099.96,1763.35 2099.96,1706.22 R62.1@2072.24,1678.5 ; IC9.4@2101.26,1596.14 2101.26,1649.49 R62.1@2072.24,1678.5
NetIC9_5: IC9.5 R61.2 | length 99.5
  Top Layer w6: R61.2@2011.26,1678.5 2012.24,1678.5 2051.26,1639.49 IC9.5@2051.26,1596.14
NetIC9_6: IC9.6 R63.2 | length 103.6
  Top Layer w6: R63.2@1951.26,1678.5 1952.24,1678.5 1991.46,1639.28 1991.46,1605.94 IC9.6@2001.26,1596.14
NetIC10_4: IC10.4 R72.2 R79.2 | length 163.3
  Top Layer w12: IC10.4@3626.26,2973.23 3626.26,2990.45 3675.59,3039.78 3678.28,3039.78 R72.2@3690,3051.5 R79.2@3690,3108.5
NetIC11_2: IC11.2 R65.2 | length 171.6
  Top Layer w6: IC11.2@2377.15,3706.77 2383,3712.63 2383,3738.65 2390.15,3745.79 2408,3745.79 2409,3746.79 2459.08,3746.79 2499.29,3787.01 R65.2@2500.28,3787.01
NetIC11_4: IC11.4 R67.2 | length 163.6
  Top Layer w8: IC11.4@2325.96,3706.77 2330.82,3711.63 2330.82,3739.06 2338.55,3746.79 2357.46,3746.79 2369.46,3758.79 2402.62,3758.79 2403.62,3759.79 2412.08,3759.79 2439.29,3787.01 R67.2@2440.28,3787.01
NetIC11_5: IC11.5 R68.2 | length 128.4
  Top Layer w6: IC11.5@2300.37,3706.77 2306.23,3712.63 2306.23,3738.65 2323.06,3755.47 2328.85,3755.47 2333.17,3759.79 2352.08,3759.79 2379.29,3787.01 R68.2@2380.28,3787.01
NetIC11_6: IC11.6 R69.2 | length 99.7
  Top Layer w6: IC11.6@2274.78,3706.77 2278.08,3710.06 2278.08,3745.79 2319.29,3787.01 R69.2@2320.28,3787.01
NetIC11_7: IC11.7 R70.2 R74.1 | length 316.8
  Top Layer w8: IC11.7@2249.19,3706.77 2254.05,3711.63 2254.05,3740.22 2278.98,3765.15 2278.98,3871.86 2251.77,3899.06 R74.1@2251.77,3940 ; R74.1@2252.76,3940 R70.2@2252.76,4000
NetIC11_8: IC11.8 R73.2 | length 91.9
  Top Layer w6: IC11.8@2223.6,3706.77 2223.6,3761.32 2249.29,3787.01 R73.2@2250.28,3787.01
NetIC11_9: IC11.9 R75.2 | length 83.4
  Top Layer w6: R75.2@2190.28,3787.01 2198.01,3779.27 IC11.9@2198.01,3706.77
NetIC11_10: IC11.10 R76.2 | length 105.1
  Top Layer w6: R76.2@2130.28,3787.01 2131.26,3787.01 2172.42,3745.85 IC11.10@2172.42,3706.77
  Top Layer w8: IC11.10@2167.56,3711.63 IC11.10@2172.42,3706.77
NetIC11_11: IC11.11 R78.2 | length 125
  Top Layer w6: R78.2@2070.28,3787.01 2071.26,3787.01 2102.8,3755.47 2124.15,3755.47 2140.97,3738.65 2140.97,3712.63 IC11.11@2146.83,3706.77
NetIC12_1: IC12.1 R80.2 | length 82.4
  Top Layer w8: IC12.1@2831.26,1596.14 R80.2@2831.26,1678.5
NetIC12_2: IC12.2 R81.2 | length 86.5
  Top Layer w6: R81.2@2771.26,1678.5 2781.26,1668.5 IC12.2@2781.26,1596.14
NetIC12_3: IC12.3 R83.2 | length 91.2
  Top Layer w6: R83.2@2711.26,1678.5 2712.24,1678.5 2731.26,1659.49 IC12.3@2731.26,1596.14
NetIC12_4: IC12.4 R85.2 R87.1 | length 261.3
  Top Layer w8: R87.1@2651.26,1678.5 R87.1@2652.24,1678.5 ; R85.2@2672.76,1830 2672.76,1770.56 2679.96,1763.35 2679.96,1706.22 R87.1@2652.24,1678.5 ; IC12.4@2681.26,1596.14 2681.26,1649.49 R87.1@2652.24,1678.5
NetIC12_5: IC12.5 R86.2 | length 99.5
  Top Layer w6: R86.2@2591.26,1678.5 2592.24,1678.5 2631.26,1639.49 IC12.5@2631.26,1596.14
NetIC12_6: IC12.6 R88.2 | length 103.6
  Top Layer w6: R88.2@2531.26,1678.5 2532.24,1678.5 2571.46,1639.28 2571.46,1605.94 IC12.6@2581.26,1596.14
NetIC14_4: IC14.4 R94.2 R103.2 | length 175.7
  Top Layer w20: R103.2@4385,4070 4443.5,4070 4451.22,4062.28 4451.22,4030.55 4476.75,4005.02 4476.75,3987.8 4479.55,3985 IC14.4@4496.77,3985
NetIC15_5: IC15.5 R108.2 R114.2 | length 242.1
  Top Layer w20: IC15.5@6582.76,4078.2 6726.28,4078.2 6748.5,4055.98 R114.2@6748.5,4055 6751.75,4051.75 6751.75,3994.74 R108.2@6755,3991.5
NetIC16_2: IC16.2 R90.2 | length 179.5
  Top Layer w6: IC16.2@3009.28,3706.77 3015.14,3712.63 3015.14,3738.65 3022.29,3745.79 3098.08,3745.79 3139.29,3787.01 R90.2@3140.28,3787.01
NetIC16_4: IC16.4 R92.2 | length 171.5
  Top Layer w8: IC16.4@2958.1,3706.77 2962.96,3711.63 2962.96,3739.06 2970.69,3746.79 2997.46,3746.79 3009.46,3758.79 3051.08,3758.79 3079.29,3787.01 R92.2@3080.28,3787.01
NetIC16_5: IC16.5 R93.2 | length 136.2
  Top Layer w6: IC16.5@2932.51,3706.77 2938.37,3712.63 2938.37,3738.65 2955.19,3755.47 2960.98,3755.47 2965.31,3759.79 2992.08,3759.79 3019.29,3787.01 R93.2@3020.28,3787.01
NetIC16_6: IC16.6 R95.2 | length 102.9
  Top Layer w6: IC16.6@2906.92,3706.77 2912.78,3712.63 2912.78,3740.49 2959.29,3787.01 R95.2@2960.28,3787.01
NetIC16_7: IC16.7 R96.2 R100.1 | length 316.5
  Top Layer w8: IC16.7@2881.33,3706.77 2886.19,3711.63 2886.19,3739.06 2899.23,3752.1 2900.93,3752.1 2913.98,3765.15 2913.98,3902.79 2906.47,3910.3 2906.47,3926.28 R100.1@2892.76,3940 R96.2@2892.76,4000
NetIC16_8: IC16.8 R98.2 | length 93
  Top Layer w6: IC16.8@2855.74,3706.77 2855.74,3758.45 2884.29,3787.01 R98.2@2885.28,3787.01
NetIC16_9: IC16.9 R101.2 | length 82.3
  Top Layer w6: R101.2@2825.28,3787.01 2830.15,3782.14 IC16.9@2830.15,3706.77
NetIC16_10: IC16.10 R104.2 | length 101.6
  Top Layer w6: R104.2@2765.28,3787.01 2765.28,3763.45 2777.68,3751.05 2786.3,3751.05 2798.7,3738.65 2798.7,3712.63 IC16.10@2804.56,3706.77
NetIC16_11: IC16.11 R109.2 | length 122.2
  Top Layer w6: R109.2@2705.28,3787.01 2706.26,3787.01 2737.8,3755.47 2756.29,3755.47 2773.11,3738.65 2773.11,3712.63 IC16.11@2778.97,3706.77
NetIC17_1: IC17.1 R99.2 | length 82.4
  Top Layer w8: IC17.1@3431.26,1596.14 R99.2@3431.26,1678.5
NetIC17_2: IC17.2 R102.2 | length 86.5
  Top Layer w6: R102.2@3371.26,1678.5 3381.26,1668.5 IC17.2@3381.26,1596.14
NetIC17_3: IC17.3 R106.2 | length 91.2
  Top Layer w6: R106.2@3311.26,1678.5 3312.24,1678.5 3331.26,1659.49 IC17.3@3331.26,1596.14
NetIC17_4: IC17.4 R110.2 R112.1 | length 261.3
  Top Layer w8: R112.1@3251.26,1678.5 R112.1@3252.24,1678.5 ; R110.2@3272.76,1830 3272.76,1770.56 3279.96,1763.35 3279.96,1706.22 R112.1@3252.24,1678.5 ; IC17.4@3281.26,1596.14 3281.26,1649.49 R112.1@3252.24,1678.5
NetIC17_5: IC17.5 R111.2 | length 99.5
  Top Layer w6: R111.2@3191.26,1678.5 3192.24,1678.5 3231.26,1639.49 IC17.5@3231.26,1596.14
NetIC17_6: IC17.6 R113.2 | length 103.6
  Top Layer w6: R113.2@3131.26,1678.5 3132.24,1678.5 3171.46,1639.28 3171.46,1605.94 IC17.6@3181.26,1596.14
NetIC18_4: IC18.4 R122.1 | length 96.4
  Top Layer w12: R122.1@775,761.5 775.98,761.5 807.48,730 822.97,730 830,737.03 830,740.44 834.41,744.85 IC18.4@834.41,760.6
NetIC18_5: IC18.5 R117.1 | length 132.7
  Top Layer w12: R117.1@775,843.5 775.98,843.5 819.71,799.78 843.7,799.78 858.13,785.35 858.13,762.47 IC18.5@860,760.6
NetIC19_1: IC19.1 R125.2 | length 82.4
  Top Layer w8: IC19.1@4021.26,1596.14 R125.2@4021.26,1678.5
NetIC19_2: IC19.2 R127.2 | length 86.5
  Top Layer w6: R127.2@3961.26,1678.5 3971.26,1668.5 IC19.2@3971.26,1596.14
NetIC19_3: IC19.3 R129.2 | length 91.2
  Top Layer w6: R129.2@3901.26,1678.5 3902.24,1678.5 3921.26,1659.49 IC19.3@3921.26,1596.14
NetIC19_4: IC19.4 R133.2 R140.1 | length 261.3
  Top Layer w8: R140.1@3841.26,1678.5 R140.1@3842.24,1678.5 ; R133.2@3862.76,1830 3862.76,1770.56 3869.96,1763.35 3869.96,1706.22 R140.1@3842.24,1678.5 ; IC19.4@3871.26,1596.14 3871.26,1649.49 R140.1@3842.24,1678.5
NetIC19_5: IC19.5 R135.2 | length 99.5
  Top Layer w6: R135.2@3781.26,1678.5 3782.24,1678.5 3821.26,1639.49 IC19.5@3821.26,1596.14
NetIC19_6: IC19.6 R141.2 | length 103.6
  Top Layer w6: R141.2@3721.26,1678.5 3722.24,1678.5 3761.46,1639.28 3761.46,1605.94 IC19.6@3771.26,1596.14
NetIC20_2: IC20.2 R121.2 | length 177.3
  Top Layer w6: IC20.2@3641.42,3706.77 3647.28,3712.63 3647.28,3738.65 3654.92,3746.29 3678.5,3746.29 3687.68,3755.47 3737.75,3755.47 3769.29,3787.01 R121.2@3770.28,3787.01
NetIC20_4: IC20.4 R124.2 | length 169.3
  Top Layer w8: IC20.4@3590.24,3706.77 3595.09,3711.63 3595.09,3739.06 3602.83,3746.79 3637.04,3746.79 3649.54,3759.29 3673.12,3759.29 3687.12,3773.29 3696.56,3773.29 R124.2@3710.28,3787.01
NetIC20_5: IC20.5 R126.2 | length 134.1
  Top Layer w6: IC20.5@3564.65,3706.77 3570.5,3712.63 3570.5,3738.65 3587.33,3755.47 3593.12,3755.47 3597.44,3759.79 3622.08,3759.79 3649.29,3787.01 R126.2@3650.28,3787.01
NetIC20_6: IC20.6 R128.2 | length 102
  Top Layer w6: IC20.6@3539.06,3706.77 3544.91,3712.63 3544.91,3742.63 3589.29,3787.01 R128.2@3590.28,3787.01
NetIC20_7: IC20.7 R131.2 R138.1 | length 314.7
  Top Layer w8: IC20.7@3513.46,3706.77 3518.32,3711.63 3518.32,3739.5 3543.98,3765.15 3543.98,3883.77 3522.76,3905 R138.1@3522.76,3940 R131.2@3522.76,4000
NetIC20_8: IC20.8 R134.2 | length 92.2
  Top Layer w6: IC20.8@3487.87,3706.77 3487.87,3760.59 3514.29,3787.01 R134.2@3515.28,3787.01
NetIC20_9: IC20.9 R139.2 | length 83.1
  Top Layer w6: R139.2@3455.28,3787.01 3462.28,3780 IC20.9@3462.28,3706.77
NetIC20_10: IC20.10 R142.2 | length 98
  Top Layer w6: R142.2@3395.28,3787.01 3396.26,3787.01 3436.69,3746.57 IC20.10@3436.69,3706.77
NetIC20_11: IC20.11 R145.2 | length 124.3
  Top Layer w6: R145.2@3335.28,3787.01 3336.26,3787.01 3367.8,3755.47 3388.42,3755.47 3405.24,3738.65 3405.24,3712.63 IC20.11@3411.1,3706.77
NetIC21_3: IC21.3 Q2.4 R146.1 | length 214.3
  Top Layer w12: R146.1@5611.5,4345 5611.5,4247.66 IC21.3@5619.15,4240 ; IC21.3@5618.31,4240 5620,4240 5655,4205 Q2.4@5709.92,4205
NetIC22_3: IC22.3 R162.2 | length 236.1
  Top Layer w8: IC22.3@5159.57,2880.67 5164.43,2885.53 5164.43,2908.52 5166.3,2910.39 5166.3,2913.85 5172.16,2919.7 5223.75,2919.7 5265,2878.45 R162.2@5265,2796.5
NetIC23_3: IC23.3 R161.2 | length 237
  Top Layer w8: IC23.3@5589.57,2880.67 5594.43,2885.53 5594.43,2908.52 5596.3,2910.39 5596.3,2913.85 5602.16,2919.7 5655.3,2919.7 5695,2880 R161.2@5695,2796.5
NetIC26_6: IC26.6 R169.2 | length 158.4
  Top Layer w8: IC26.6@6212.01,1970.16 6213.91,1968.25 6231.01,1968.25 6240.12,1959.14 6240.12,1934.91 6247.35,1927.68 6292.65,1927.68 6299.76,1934.79 6316.28,1934.79 R169.2@6330,1948.5
NetIC27_4: IC27.4 IC31.3 R179.2 | length 491.9
  Top Layer w8: IC27.4@4600,1631.77 4600,1614.55 4622.8,1591.75 4622.8,1570.44 4639.23,1554 4679.19,1554 4727.2,1602.02 4727.2,1669.87 4738.62,1681.29 4738.62,1726.1 R179.2@4774.02,1761.5 ; IC31.3@4675,1788.31 4747.2,1788.31 R179.2@4774.02,1761.5 ; R179.2@4775,1761.5 R179.2@4774.02,1761.5
NetIC28_4: IC28.4 IC32.3 R180.2 | length 490.9
  Top Layer w8: IC28.4@5700,1631.77 5700,1614.55 5722.8,1591.75 5722.8,1570.44 5739.23,1554 5779.19,1554 5827.2,1602.02 5827.2,1669.87 5838.62,1681.29 5838.62,1726.1 5874.02,1761.5 5847.2,1788.31 IC32.3@5775,1788.31
NetIC33_4: IC33.4 IC37.3 R185.2 | length 490.9
  Top Layer w8: IC33.4@4875,1631.77 4875,1614.55 4897.8,1591.75 4897.8,1570.44 4914.23,1554 4954.19,1554 5002.2,1602.02 5002.2,1669.87 5013.62,1681.29 5013.62,1726.1 5049.02,1761.5 5022.2,1788.31 IC37.3@4950,1788.31
NetIC34_4: IC34.4 IC38.3 R186.2 | length 490.9
  Top Layer w8: IC34.4@5425,1631.77 5425,1614.55 5447.8,1591.75 5447.8,1570.44 5464.23,1554 5504.19,1554 5552.2,1602.02 5552.2,1669.87 5563.62,1681.29 5563.62,1726.1 5599.02,1761.5 5572.2,1788.31 IC38.3@5500,1788.31
NetIC39_4: IC39.4 IC43.3 R200.2 | length 497.9
  Top Layer w8: IC39.4@4325,1631.77 4325,1614.55 4347.8,1591.75 4347.8,1565.44 4364.23,1549 4399.19,1549 4452.2,1602.02 4452.2,1669.87 4463.62,1681.29 4463.62,1726.1 4499.02,1761.5 4472.2,1788.31 IC43.3@4400,1788.31
NetIC40_4: IC40.4 IC44.3 R201.2 | length 490.9
  Top Layer w8: IC40.4@5150,1631.77 5150,1614.55 5172.8,1591.75 5172.8,1570.44 5189.23,1554 5229.19,1554 5277.2,1602.02 5277.2,1669.87 5290,1682.67 5290,1727.48 5324.02,1761.5 5297.2,1788.31 IC44.3@5225,1788.31
NetJ66_2: J66.2 R176.2 | length 129.6
  Top Layer w8: R176.2@7016.5,1560 7016.5,1559.02 7100,1475.51 J66.2@7100,1465
NetLED1_1: LED1.1 R163.1 | length 50.8
  Top Layer w8: R163.1@4808.5,210 4810.47,208.04 LED1.1@4810.47,160
NetLED2_1: LED2.1 R166.1 | length 50.8
  Top Layer w8: R166.1@4968.5,210 4970.47,208.04 LED2.1@4970.47,160
NetLED3_2: LED3.2 R168.2 | length 50.8
  Top Layer w8: LED3.2@5814.52,160 5814.52,208.03 R168.2@5816.5,210
NetLED4_2: LED4.2 R170.2 | length 50.8
  Top Layer w8: LED4.2@5974.52,160 5974.52,208.03 R170.2@5976.5,210
NetR150_1: R150.1 R151.2 | length 60
  Top Layer w8: R150.1@6630,4538.5 R151.2@6690,4538.5
NetR152_1: R152.1 R153.2 | length 89
  Top Layer w8: R152.1@6210,4538.5 6210.98,4538.5 6255.3,4582.82 6255.3,4587.78 6269.02,4601.5 R153.2@6270,4601.5
NetR171_2: R171.2 U2.11 | length 415
  Top Layer w8: U2.11@6190.9,1800.55 6190.9,1834.01 6231.89,1875 6450.51,1875 6524.02,1948.5 R171.2@6525,1948.5
NetR172_2: R172.2 U2.12 | length 393.3
  Top Layer w8: U2.12@6147.59,1800.55 6147.59,1834.01 6202.58,1889 6399.51,1889 6459.02,1948.5 R172.2@6460,1948.5
NetR174_2: R174.2 U2.13 | length 371.6
  Top Layer w8: U2.13@6104.29,1800.55 6104.29,1834.01 6173.28,1903 6348.51,1903 6394.02,1948.5 R174.2@6395,1948.5
NetR191_2: R191.2 R192.1 | length 1600.9
  Top Layer w8: R191.2@4365,826.5 v1(4365,875) ; v1(4610,2048.09) 4610,1977.52 4639.02,1948.5 R192.1@4640,1948.5
  Bottom Layer w8: v1(4365,875) 4365,991.78 4351,1005.78 4351,1276.05 4280,1347.05 4280,1880 4448.09,2048.09 v1(4610,2048.09)
NetR194_2: R194.2 R195.1 | length 1945.2
  Top Layer w8: R194.2@4425,826.5 v1(4425,875) ; v1(5000,1910) R195.1@5000,1948.5
  Bottom Layer w8: v1(4425,875) 4425,951.58 4365,1011.58 4365,1285 4294,1356 4294,1869 4440,2015 4895,2015 v1(5000,1910)
NetR197_2: R197.2 R198.1 | length 3375.7
  Top Layer w8: R197.2@5330,986.5 v1(5330,1055) ; R198.1@7012.99,2890 v1(7085,2890)
  POWER w8: v1(5330,1055) 5379,1104 6278.6,1104 6378.6,1104 6498.6,1104 6839,1444.4 6839,2334.2 7106,2601.2 7106,2869 v1(7085,2890)
NetR202_2: R202.2 R203.1 | length 3374.6
  Top Layer w8: R202.2@5065,986.5 v1(5065,1120) ; R203.1@7012.99,2650 v1(7066,2650)
  POWER w8: v1(5065,1120) 5068.06,1123.06 5076.92,1123.06 5077.69,1123.83 5359.23,1123.83 5367.4,1132 6487,1132 6811,1456 6811,2351 7070,2610 7070,2625.67 7069.06,2626.61 7069.06,2646.94 v1(7066,2650)
NetR209_2: R209.2 R210.1 | length 3449.2
  Top Layer w8: R209.2@5125,986.5 v1(5125,1090) ; R210.1@7012.99,2770 v1(7070,2770)
  POWER w8: v1(5125,1090) 5127.69,1090 5147.51,1109.83 5365.03,1109.83 5373.2,1118 6372.8,1118 6492.8,1118 6825,1450.2 6825,2340 7092,2607 7092,2748 v1(7070,2770)
NetR212_2: R212.2 R213.1 | length 3369.2
  Top Layer w8: R212.2@5465,986.5 v1(5465,1030) ; R213.1@7012.99,3010 v1(7085,3010)
  POWER w8: v1(5465,1030) 5525,1090 6284.4,1090 6384.4,1090 6504.4,1090 6853,1438.6 6853,2328.4 7120,2595.4 7120,2975 v1(7085,3010)
OE1_PTB5: BTB2.4 IC41.6 R205.1 | length 3176.3
  Top Layer w8: IC41.6@4409.84,1352.01 4411.75,1350.1 4411.75,1333.01 4419.48,1325.28 4454.29,1325.28 4479.02,1350 R205.1@4480,1350 4493.72,1363.72 4497.24,1363.72 4515.53,1382 4520.77,1382 4536,1397.23 4536,1418.77 4536,1773.06 4623.94,1861 5070.8,1861 5249.8,2040 5519.4,2040 5567.4,2088 5836.99,2088 5971.99,2223 6575.8,2226 6624.12,2274.32 6769.52,2274.32 6792.11,2296.91 6792.11,2381.87 6772.25,2401.73 6769.92,2401.73 6758.27,2413.39 BTB2.4@6738.58,2413.39
OE2_PTD15: BTB2.6 IC29.6 R181.1 | length 3032.6
  Top Layer w8: IC29.6@4684.69,1350 4686.59,1348.09 4686.59,1331 4694.32,1323.27 4725.79,1323.27 4754.02,1351.5 R181.1@4755,1351.5 4768.72,1365.21 4776.98,1365.21 4793.77,1382 4795.77,1382 4811,1397.23 4811,1773.06 4870.94,1833 5082.4,1833 5261.4,2012 5530.99,2012 5578.99,2060 5848.59,2060 5983.59,2195 6555,2195 6622.98,2195 6637.13,2180.85 6729.35,2180.85 6820.11,2271.61 6820.11,2416.87 6772.25,2464.72 6769.92,2464.72 6758.27,2476.38 BTB2.6@6738.58,2476.38
OE3_PTD17: BTB2.8 IC36.6 R189.1 | length 2882.3
  Top Layer w8: IC36.6@4959.84,1352.01 4961.75,1350.1 4961.75,1333.01 4969.48,1325.28 5002.8,1325.28 5029.02,1351.5 R189.1@5030,1351.5 5043.72,1365.21 5057.98,1365.21 5080,1387.23 5080,1791.01 5272.99,1984 5542.59,1984 5590.59,2032 5860.19,2032 5993.19,2165 6613.38,2165 6627.38,2151 6739.1,2151 6848.11,2260.01 6848.11,2451.86 6772.25,2527.72 6769.92,2527.72 6758.27,2539.37 BTB2.8@6738.58,2539.37
OE4_PTE12: BTB2.10 IC42.6 R206.1 | length 2700
  Top Layer w8: IC42.6@5234.84,1352.01 5236.75,1350.1 5236.75,1333.01 5244.48,1325.28 5277.8,1325.28 5304.02,1351.5 R206.1@5305,1351.5 5318.72,1365.21 5321.78,1365.21 5338.56,1382 5345.56,1382 5360.8,1397.23 5360.8,1418.77 5359,1420.56 5359,1771.06 5543.94,1956 5575.69,1956 5623.69,2004 5871.79,2004 6002.79,2135 6603.79,2135 6615.79,2123 6750.7,2123 6876.11,2248.41 6876.11,2486.85 6772.25,2590.71 6769.92,2590.71 6758.27,2602.36 BTB2.10@6738.58,2602.36